# Altium PCB PCB_Eval2_ALBOUY_Thomas.PcbDoc
Units mm, origin at the board's own origin, x right, y up, seen from the top; angles counter-clockwise.
Board outline 50 x 40 mm, 2 copper layers (Top Layer, Bottom Layer); 13 components, 10 nets, 54 pads, 7 vias.
Unrouted connection lines stored in the file: 1.
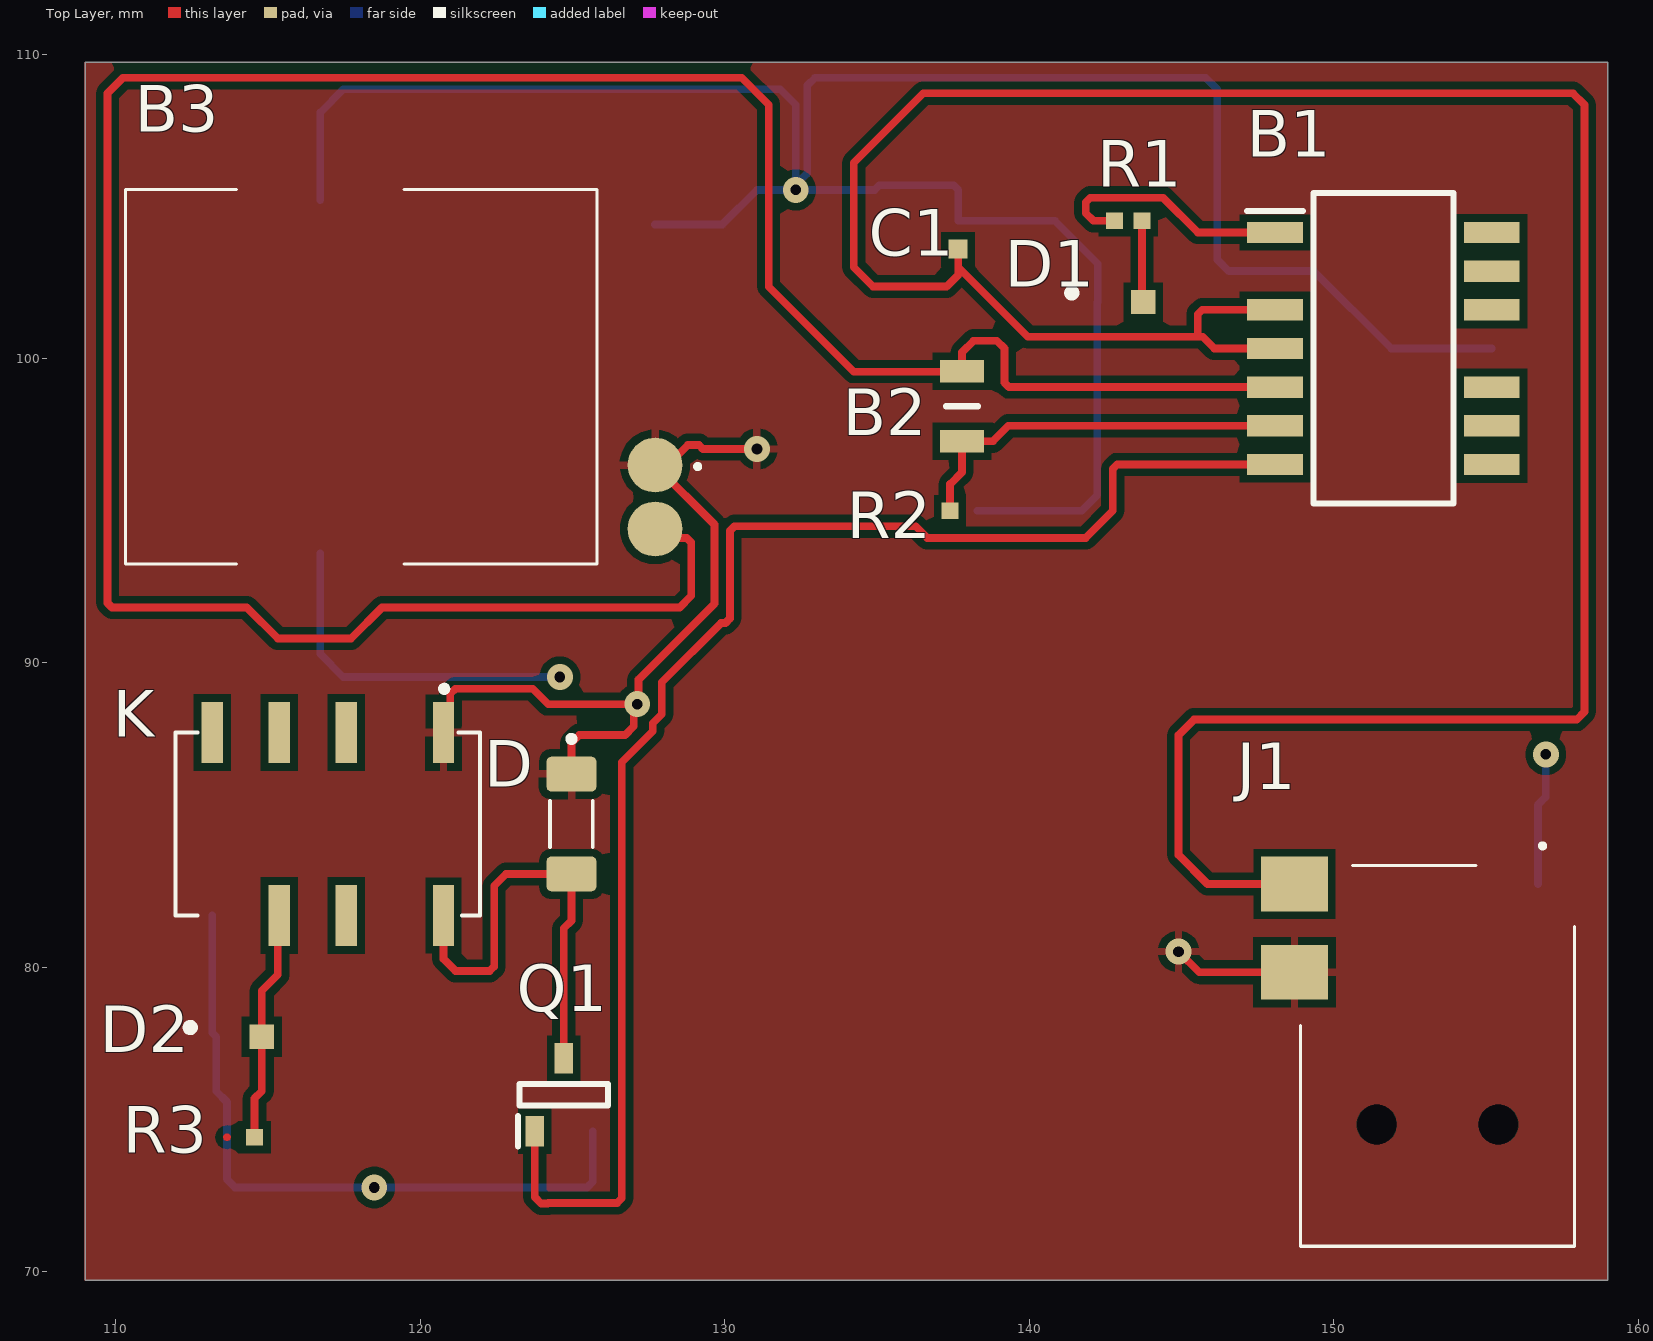
[diagram p0: Top Layer view]
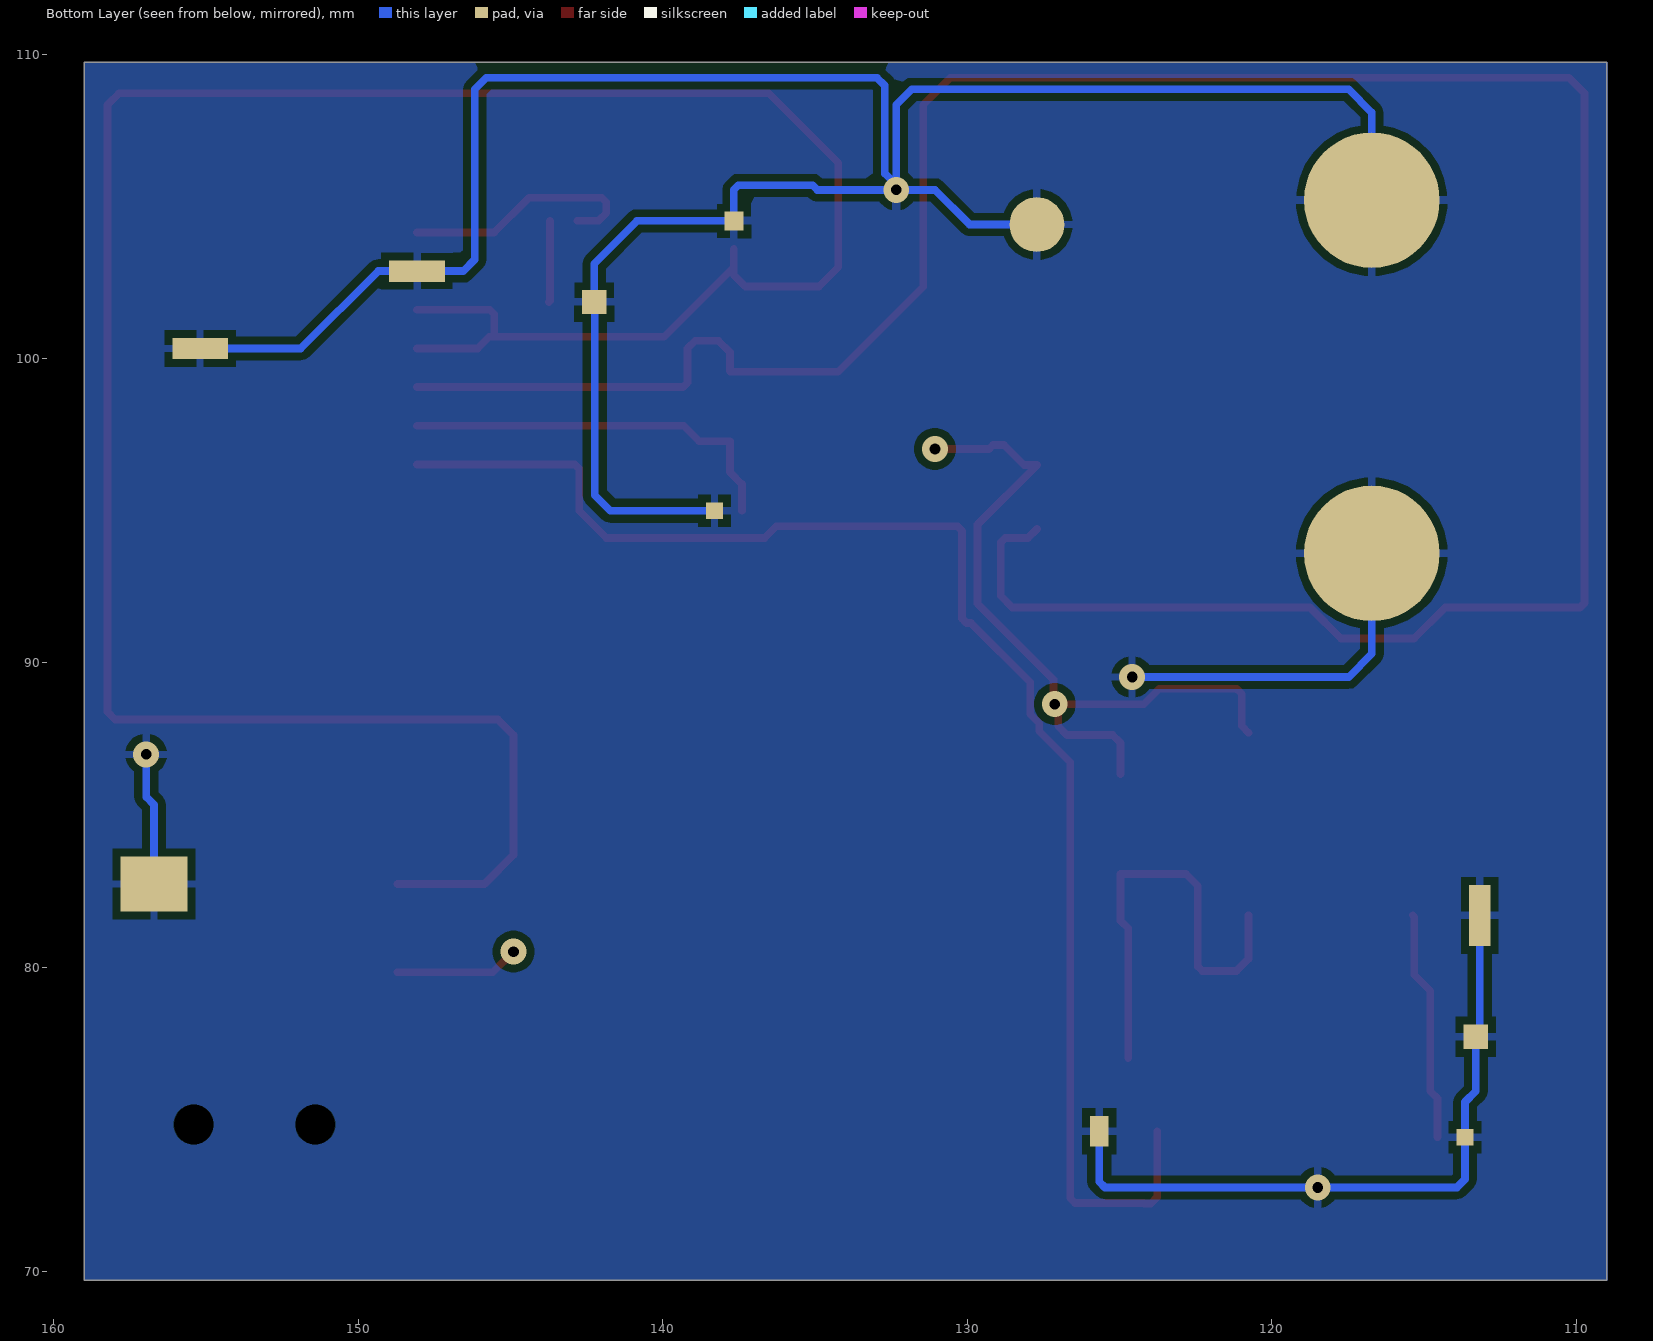
[diagram p1: Bottom Layer view, seen from below]
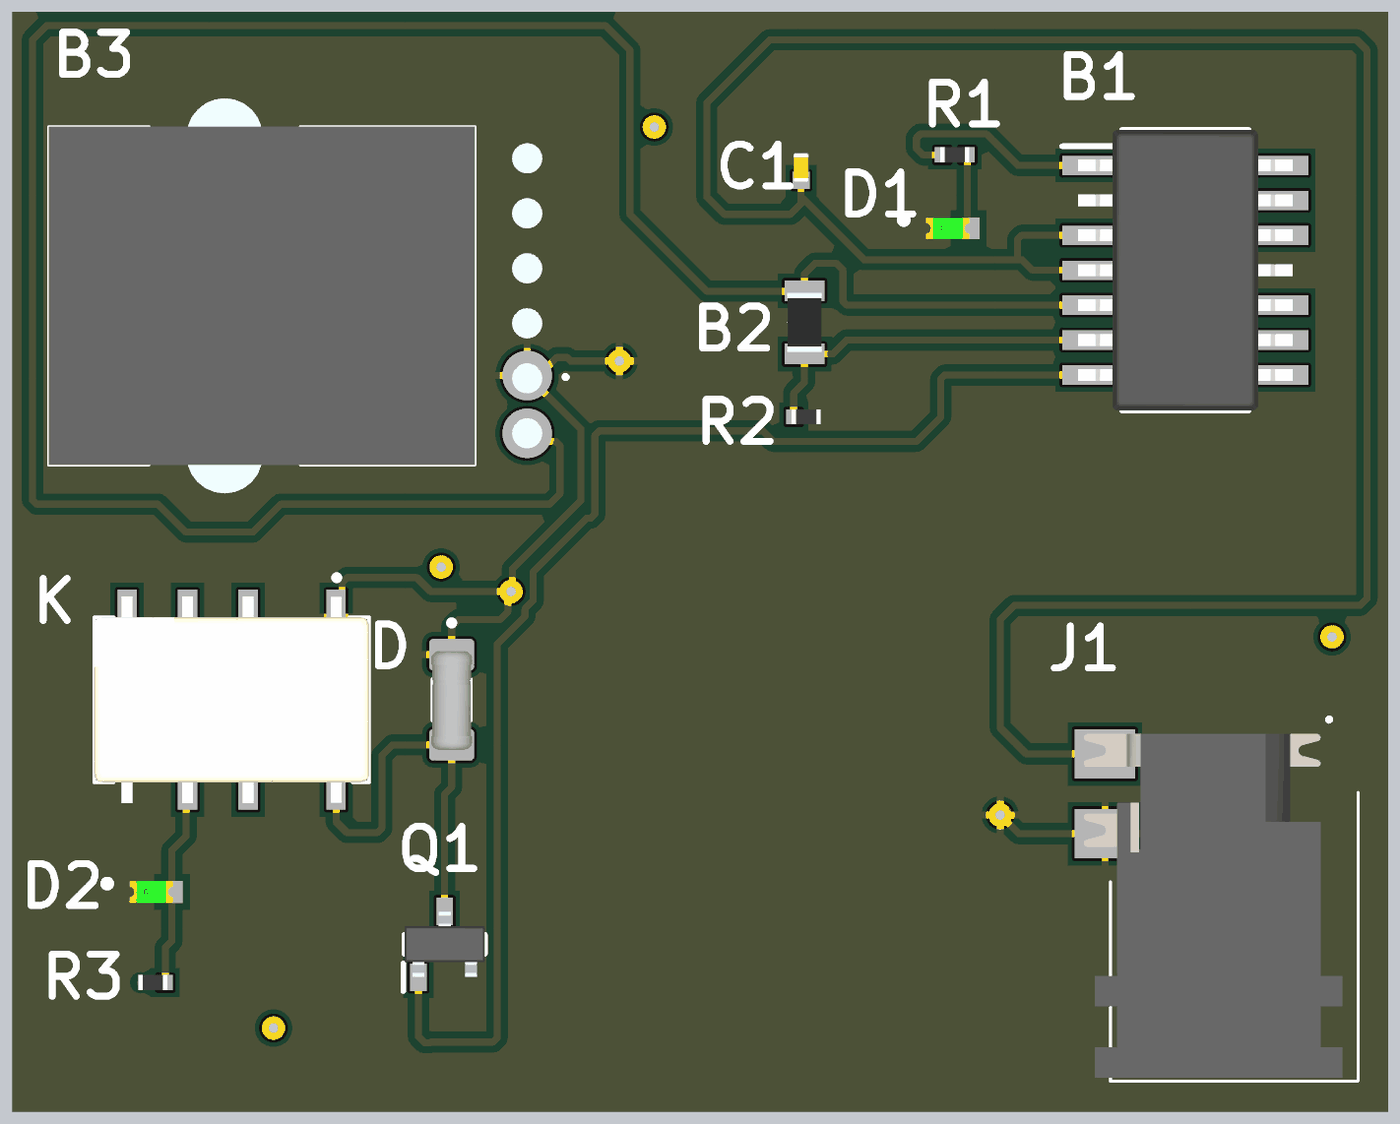
[diagram p2: 3D render of the assembled board from above, using the file's embedded part models]

## Layer stack, top to bottom
Top Solder: solder mask 0.0102, Solder Resist, Dk 3.5
Top Layer: signal copper 0.0356
Dielectric 1: dielectric 0.32, FR-4, Dk 4.8
Bottom Layer: signal copper 0.0356
Bottom Solder: solder mask 0.0102, Solder Resist, Dk 3.5

## Board outline
109.004,69.728 109.004,109.728 159.004,109.728 159.004,69.728

## Design rules (kind name [scope] priority, off if disabled: settings)
Clearance [All] p1: gap=0.254 ignorepadtopadclearanceinfootprint=FALSE except(0: Arc-Hole Track-Hole SMDPad-Hole THPad-Hole Via-Hole Fill-Hole Poly-Hole Region-Hole Text-Hole)
PolygonConnect [All] p1: connectstyle=Relief reliefconductorwidth=0.254 reliefentries=4 polygonreliefangle="90 Angle" airgapwidth=0.254
RoutingVias [All] p1: holewidth=0.711 width=1.27 viastyle="Through Hole" minholewidth=0.711 minwidth=1.27 maxholewidth=0.711 maxwidth=1.27
SolderMaskExpansion [All] p1: expansion=0.102 istentingtop=FALSE
SupplyNets "Schematic Supply Nets_2" [InNet('')] p1: voltage=0.000
SupplyNets "Schematic Supply Nets_1" [InNet('GND')] p2: voltage=0.000
SupplyNets "Schematic Supply Nets" [InNet('+12VDC')] p3: voltage=0.000
Width [All] p1: maxlimit=0.254 minlimit=0.254 preferedwidth=0.254
30 further rules are at their usual default settings.

## Classes and differential pairs
component class RELAIS: D D2 K Q1 R3
component class "CIRCUIT PRIMAIRE": B1 B2 B3 C1 D1 J1 R1 R2

## Components (designator, comment, footprint, x,y, rotation, side; value= is the part's Value field where it differs from the comment)
B1 "LM324NSR" SOIC127P780X200-14N 151.638,100.33 r0 top
B2 "NB12K00103JBB" RESC2212X50N 137.795,98.432 r90 top
B3 "PTV112-4420A-B104" PTV1124420AB104 127.713,96.399 r90 top
C1 "10uF" CAPC1005X06N 137.668,104.061 r90 top
D "FDLL4148" DIOMELF3414N 124.968,84.709 r270 top
D1 "LED-GREEN" SMD-1608-LED 143.002,101.854 r0 top
D2 "LED-GREEN" SMD-1608-LED 114.046,77.724 r0 top
J1 "ADC-028-1-T/R" PJ1021SMTTR 153.416,77.089 r90 top
K "IM06GR" RELAY_IM06GR 116.967,84.709 r270 top
Q1 "BCW66GLT3G" SOT96P237X111-3N 124.714,75.819 r90 top
R1 "100Ω" RESC1005X06N#1 143.256,104.521 r0 top
R2 "10KΩ" RESC1005X06N#2 137.853,94.996 r180 top
R3 "100 Ω" RESC1005X06N#3 114.104,74.422 r180 top

## Footprints (in the part's own frame and the unit in brackets; to place one, negate y for a bottom-side part, rotate by r counter-clockwise, add the part's x,y. Pads: shape width x height; smd on the part's side, far side on the other; paste and mask are expansions set on the pad)
CAPC1005X06N [mm] "Chip Capacitor, 2-Leads, Body 1,00x0,50mm, IPC Medium Density"
  rect 0.62x0.62 smd: 1(-0.46,0)
  rect 0.62x0.62 smd far side: 2(0.46,0)
  body extent -0.53,-0.28 0.53,0.28, height 0.55
DIOMELF3414N [mm]
  rrect25% 1.14x1.63 smd: A(1.64,0) C(-1.64,0)
  silkscreen extent -2.89,-0.7 0.75,0.7, body extent -1.78,-0.75 1.82,0.75, height 1.44
PJ1021SMTTR [mm]
  rect 1.8x2.2 smd far side: 1(5.65,-3.3)
  rect 1.8x2.2 smd: 2(2.75,4.7) 3(5.65,4.7)
  round 0.65 hole 1.3 unplated: MH1(-2.25,-2) MH2(-2.25,2)
  silkscreen extent -6.25,-4.5 6.95,4.5, body extent -6.12,-3.94 6.38,5.46, height 6.01
PTV1124420AB104 [mm]
  round 1.8 smd: A1(0.1,0) A2(-2,0)
  round 1.8 smd far side: A3(8,0)
  round 1.8 on Mech1: B1(2,0) B2(4,0) B3(6,0)
  round 4.455 smd far side: MH1(-2.8,11) MH2(8.8,11)
  silkscreen extent -3.15,-1.45 9.15,17.4, body extent -4.17,-0.55 10.19,17.4, height 20.6
RELAY_IM06GR [mm]
  rect 2x0.7 smd: 1(-3,3.8) 2(-3,0.6) 3(-3,-1.6) 4(-3,-3.8) 6(3,-1.6) 7(3,0.6) 8(3,3.8)
  rect 2x0.7 smd far side: 5(3,-3.8)
  silkscreen extent -4.54,-5 3,5, body extent -3.75,-5 3.75,5, height 5.65
RESC1005X06N#1 [mm] "Chip Resistor, 2-Leads, Body 1,00x0,50mm, IPC Medium Density"
  rect 0.55x0.55 smd: 1(-0.45,0) 2(0.45,0)
  body extent -0.53,-0.28 0.53,0.28, height 0.55
RESC1005X06N#2 [mm] "Chip Resistor, 2-Leads, Body 1,00x0,50mm, IPC Medium Density"
  rect 0.55x0.55 smd far side: 1(-0.45,0)
  rect 0.55x0.55 smd: 2(0.45,0)
  body extent -0.53,-0.28 0.53,0.28, height 0.55
RESC1005X06N#3 [mm] "Chip Resistor, 2-Leads, Body 1,00x0,50mm, IPC Medium Density"
  rect 0.55x0.55 smd: 1(-0.45,0)
  rect 0.55x0.55 smd far side: 2(0.45,0)
  body extent -0.53,-0.28 0.53,0.28, height 0.55
RESC2212X50N [mm]
  rect 0.75x1.45 smd: 1(-1.15,0) 2(1.15,0)
  silkscreen extent 0,-0.53 0,0.53, body extent -1.07,-0.63 1.07,0.63, height 0.5
SMD-1608-LED [mm]
  rect 0.8x0.8 smd far side paste+0 mask+0: 1(-0.75,0)
  rect 0.8x0.8 smd paste+0 mask+0: 2(0.75,0)
  silkscreen extent -1.72,0.18 -1.47,0.42, body extent -1.25,-0.55 1.25,0.55, height 0.25
SOIC127P780X200-14N [mm]
  rect 1.825x0.7 smd: 1(-3.562,3.81) 3(-3.562,1.27) 4(-3.562,0) 5(-3.562,-1.27) 6(-3.562,-2.54) 7(-3.562,-3.81) 8(3.562,-3.81) 9(3.562,-2.54) 10(3.562,-1.27) 12(3.562,1.27) 13(3.562,2.54) 14(3.562,3.81)
  rect 1.825x0.7 smd far side: 2(-3.562,2.54) 11(3.562,0)
  silkscreen extent -4.47,-5.1 2.3,5.1, body extent -3.9,-5.1 3.9,5.1, height 2
SOT96P237X111-3N [mm]
  rect 1x0.6 smd: 1(-1.2,0.955) 3(1.2,0)
  rect 1x0.6 smd far side: 2(-1.2,-0.955)
  silkscreen extent -1.7,-1.46 0.35,1.51, body extent -1.18,-1.46 1.18,1.46, height 1.11

## Part data
B1: "Quadruple Operational Amplifier", Manufacturer_Name="Texas Instruments", Mouser Part Number=595-LM324NSR, Arrow Part Number=LM324NSR, Arrow Price/Stock=https://www.arrow.com/en/products/lm324nsr/texas-instruments?utm_currency=USD&region=nac, Datasheet Link=http://www.ti.com/lit/gpn/LM324, Geometry.Height=2mm, Manufacturer_Part_Number=LM324NSR, Mouser Price/Stock=https://www.mouser.co.uk/ProductDetail/Texas-Instruments/LM324NSR?qs=VBduBm9rCJQcjq4eh95DkA%3D%3D
B2: "NTC SMD Thermistor, NB12K, 10K, 5% AVX 10k 0805 Protection NTC Thermistor, 5s, 2 x 1.25 x 1.3mm", Manufacturer_Name="Kyocera AVX", Mouser Part Number=581-NB12K00103JBB, Arrow Part Number=NB12K00103JBB, Arrow Price/Stock=https://www.arrow.com/en/products/nb12k00103jbb/avx, Datasheet Link=https://datasheet.datasheetarchive.com/originals/distributors/Datasheets-DGA6/551314.pdf, Geometry.Height=0.5mm, Manufacturer_Part_Number=NB12K00103JBB, Mouser Price/Stock=https://www.mouser.co.uk/ProductDetail/AVX/NB12K00103JBB/?qs=4%252B6%252BTdINQeDPvI%252BQUQjJ3Q%3D%3D
B3: "Potentiometers PANEL CONTROL 100kOhm", Manufacturer_Name=Bourns, Mouser Part Number=652-PTV1124420AB104, Datasheet Link=https://www.bourns.com/docs/Product-Datasheets/PTVPTT.pdf, Geometry.Height=20.5mm, Manufacturer_Part_Number=PTV112-4420A-B104, Mouser Price/Stock=https://www.mouser.co.uk/ProductDetail/Bourns/PTV112-4420A-B104?qs=nqw9FAyaR8PT4wHHFlLdhA%3D%3D
C1: library part Capacitor
D: "Diode Standard 100V 200mA Surface Mount SOD-80", Package="SOD-80-2 ON Semiconductor", Digi-Key_Part_Number=FDLL4148CT-ND, DigiKey-Purchase-URL=https://snapeda.com/shop?store=DigiKey&id=2783433, MF="ON Semiconductor", Mouser-Purchase-URL=https://snapeda.com/shop?store=Mouser&id=2783433, MP=FDLL4148, SnapEDA_Link=https://www.snapeda.com/parts/FDLL4148/ON%20Semiconductor/view-part/2783433/?ref=snap
D1 D2: "LED GREEN CLEAR CHIP SMD LTST-C190GKT", Case Code (Imperial)=0603, Case Code (Metric)=1608, Color=Green, Forward Current=30mA, Forward Voltage=2.1V, Lens Color=Colorless, Max Operating Temperature=85°C, Min Operating Temperature=-55°C, Package Quantity=1, Power Dissipation=100mW, Reverse Voltage=5V, Test Current=10mA, Voltage=2V, Case/Package=0603, Depth=0.8mm, Dominant Wavelength=569nm, Height=0.8mm, Illumination Color=Green, Lead Free="Lead Free", Length=1.6mm, Lens Style=Clear, Lens Transparency=Clear, Luminous Intensity=6mcd, Mount="Surface Mount", Number of Elements=1, Number of LEDs=1, Number of Pins=2, Packaging="Tape and Reel", Power Rating=100mW, Radiation Hardening=No, Viewing Angle=130°, Wavelength=565nm, Width=0.8mm
J1: "Connecteurs d'alimentation continue DC POWER JACK 2MM PIN TYPE 028", Manufacturer_Name="Same Sky", Mouser Part Number=737-ADC-028-1-T/R, Geometry.Height=6mm, Manufacturer_Part_Number=ADC-028-1-T/R, Mouser Price/Stock=https://www.mouser.fr/ProductDetail/Adam-Tech/ADC-028-1-T-R?qs=TTVbHWoAP%2FSiqsZeR9Co0Q%3D%3D
K: "Electromechanical Relay 12VDC 1.029KOhm 2A DPDT _10x7.5x5.65_mm SMD Signal Relay", Package=None, Availability=Unavailable, MF="TE Connectivity", MP=IM06GR, Price=None, SnapEDA_Link=https://www.snapeda.com/parts/IM06GR/TE%20Connectivity%20Potter%20%26%20Brumfield%20Relays/view-part/264147/?ref=snap, TE_purchase_URL=https://www.te.com/usa-en/product-2-1462037-3.html?te_bu=Cor&te_type=disp&te_campaign=seda_glo_cor-seda-global-disp-prtnr-fy19-seda-model-bom-cta_sma-317_1&elqCampaignId=32493
Q1: "NPN Bipolar Transistor", Manufacturer_Name=onsemi, Mouser Part Number=863-BCW66GLT3G, Arrow Part Number=BCW66GLT3G, Arrow Price/Stock=https://www.arrow.com/en/products/bcw66glt3g/on-semiconductor?region=europe, Datasheet Link=http://www.onsemi.com/pub/Collateral/BCW66GLT1-D.PDF, Geometry.Height=1.11mm, Manufacturer_Part_Number=BCW66GLT3G, Mouser Price/Stock=https://www.mouser.co.uk/ProductDetail/onsemi/BCW66GLT3G?qs=XfkxeqX9xWXeTiewInI3Nw%3D%3D
R1 R2 R3: library part Resistor

## Via types
v1: diameter 0.85, hole 0.35, Top Layer to Bottom Layer, 7 vias

## Nets (pads, with @x,y where several pads share a name; then routed paths per layer and width w, separated by ;. In a path a pad name is that pad's centre, name@x,y a point inside that pad or via, vN(x,y) a via of type N, cw(c..) or ccw(c..) an arc to the next point about the centre after c; other vN are vias at no path point)
+12VDC: B3.A1 D.C J1.2 K.1 | length 29.3
  Top Layer w0.254: K.1 120.99,87.932 120.99,88.986 121.158,89.154 123.698,89.154 124.206,88.646 v1(127.127,88.646) ; D.C 124.968,87.376 125.222,87.63 126.724,87.63 127.013,87.919 127.013,88.532 v1(127.127,88.646) ; v1(131.064,97.028) 129.286,97.028 129.159,97.155 128.787,97.155 128.131,96.499 B3.A1 129.667,94.545 129.667,91.948 127.171,89.452 127.171,88.69 v1(127.127,88.646) ; v1(144.907,80.518) 145.586,79.839 J1.2
GND: B1.2 B1.11 B3.A3 B3.MH1 B3.MH2 C1.2 D1.1 D2.1 J1.1 K.5 Q1.2 R2.1 R3.2 | length 121.9
  Top Layer w0.254: 113.654,74.422 113.665,74.422
  Bottom Layer w0.254: K.5 113.167,77.853 D2.1 113.296,75.934 113.654,75.576 R3.2 113.654,73.036 113.919,72.771 v1(118.491,72.771) 125.476,72.771 125.669,72.964 Q1.2 ; B3.MH1 116.713,90.297 117.475,89.535 v1(124.587,89.535) ; B3.MH2 116.713,108.077 117.475,108.839 131.826,108.839 132.334,108.331 v1@132.334,105.698 ; B3.A3 129.926,104.399 131.064,105.537 v1(132.334,105.537) ; R2.1 141.732,94.996 142.24,95.504 142.24,101.842 D1.1 142.252,103.116 140.847,104.521 C1.2 137.668,105.537 137.519,105.686 135.082,105.686 134.933,105.537 v1(132.334,105.537) ; B1.11 151.892,100.33 149.352,102.87 B1.2 146.558,102.87 146.177,103.251 146.177,108.839 145.796,109.22 132.969,109.22 132.715,108.966 132.715,106.079 v1@132.334,105.698 ; J1.1 156.716,85.342 156.972,85.598 v1(156.972,86.995) ; v1(132.334,105.537) v1@132.334,105.698
NetB1_1: B1.1 R1.1 | length 8.2
  Top Layer w0.254: R1.1 142.113,104.521 141.859,104.775 141.859,105.134 142.008,105.283 144.399,105.283 145.542,104.14 B1.1
NetB1_3: B1.3 B1.4 C1.1 J1.3 | length 89.8
  Top Layer w0.254: C1.1 137.668,102.997 ; B1.4 146.084,100.33 145.703,100.711 145.542,100.711 ; B1.3 145.691,101.6 145.542,101.451 145.542,100.711 ; J1.3 145.861,82.739 144.907,83.693 144.907,87.63 145.415,88.138 157.988,88.138 158.242,88.392 158.242,108.331 157.861,108.712 136.525,108.712 134.239,106.426 134.239,102.997 134.874,102.362 137.287,102.362 137.668,102.743 137.668,102.997 ; 137.668,102.997 139.954,100.711 145.542,100.711
NetB1_5: B1.5 B2.2 B3.A2 | length 88.2
  Top Layer w0.254: B3.A2 128.009,94.103 128.756,94.103 128.905,93.954 128.905,92.202 128.524,91.821 118.745,91.821 117.729,90.805 115.316,90.805 114.3,91.821 109.877,91.821 109.728,91.97 109.728,108.712 110.236,109.22 130.556,109.22 131.445,108.331 131.445,102.362 134.239,99.568 137.781,99.568 B2.2 137.795,100.203 138.176,100.584 138.938,100.584 139.192,100.33 139.192,99.209 139.341,99.06 B1.5
NetB1_6: B1.6 B2.1 R2.2 | length 12.9
  Top Layer w0.254: R2.2 137.403,95.874 137.795,96.266 B2.1 138.811,97.282 139.319,97.79 B1.6
NetB1_7: B1.7 Q1.1 | length 48.6
  Top Layer w0.254: Q1.1 123.759,72.456 123.974,72.241 124.184,72.241 124.206,72.263 126.47,72.263 126.619,72.412 126.619,86.741 127.635,87.757 127.635,88.014 127.933,88.312 127.933,89.364 129.882,91.313 130.026,91.313 130.175,91.462 130.175,94.339 130.324,94.488 136.271,94.488 136.652,94.107 141.859,94.107 142.748,94.996 142.748,96.371 142.897,96.52 B1.7
NetD1_2: D1.2 R1.2 | length 2.7
  Top Layer w0.254: R1.2 143.706,101.9 D1.2
NetD2_2: D2.2 K.6 R3.1 | length 7.6
  Top Layer w0.254: R3.1 114.554,75.692 114.796,75.934 D2.2 114.796,79.236 115.316,79.756 115.316,81.658 K.6
NetD_A: D.A K.8 Q1.3 | length 14.8
  Top Layer w0.254: K.8 120.767,80.274 121.158,79.883 122.279,79.883 122.428,80.032 122.428,82.677 122.82,83.069 D.A 124.968,81.534 124.714,81.28 Q1.3
pads on no net: B1.8 B1.9 B1.10 B1.12 B1.13 B1.14 B3.B1 B3.B2 B3.B3 J1.MH1 J1.MH2 K.2 K.3 K.4 K.7

## Polygon pours and split planes (outlines as drawn)
GND on Bottom Layer "GND_L02_P000" (solid, pour order 0): 108.966,109.728 159.004,109.728 159.004,69.723 108.966,69.723
+12VDC on Top Layer "+12VDC_L01_P002" (solid, pour order 2): 108.966,109.728 159.004,109.728 159.004,69.723 108.966,69.723

## Silkscreen, mask and mechanical layers (free items; w line width, h text height)
Mechanical 1:
  the board outline again, w0.254